# Altium PCB lcarus Som.PcbDoc
Units mm, origin at the board's own origin, x right, y up, seen from the top; angles counter-clockwise.
Board outline 24 x 30 mm, 2 copper layers (Top Layer, Bottom Layer); 20 components, 44 nets, 86 pads, 67 vias.
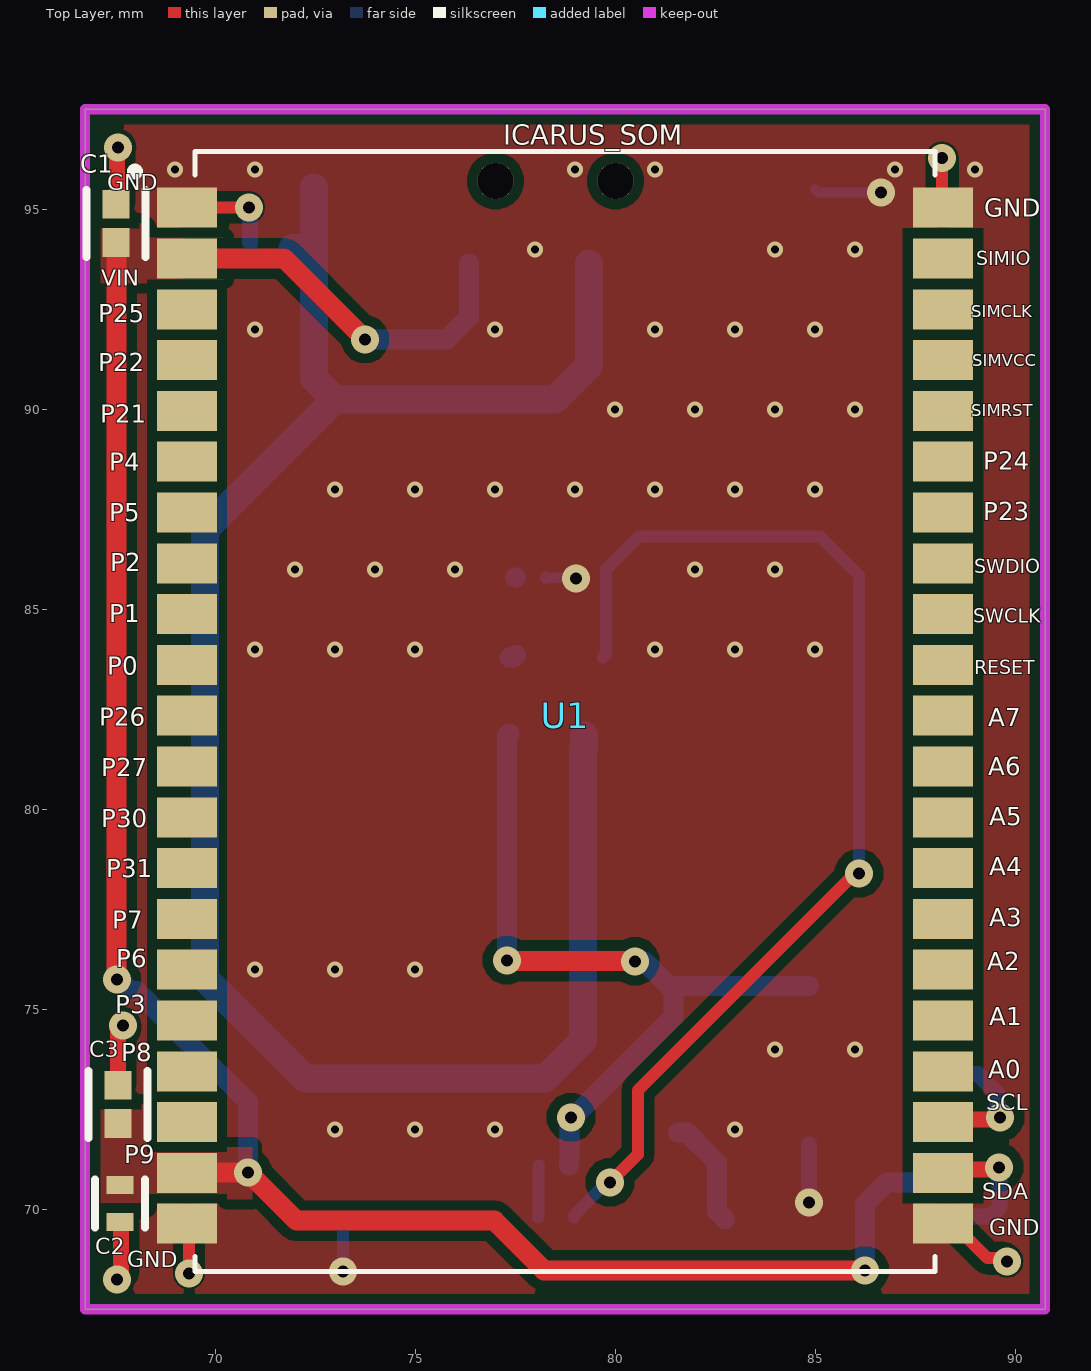
[diagram p0: Top Layer view]
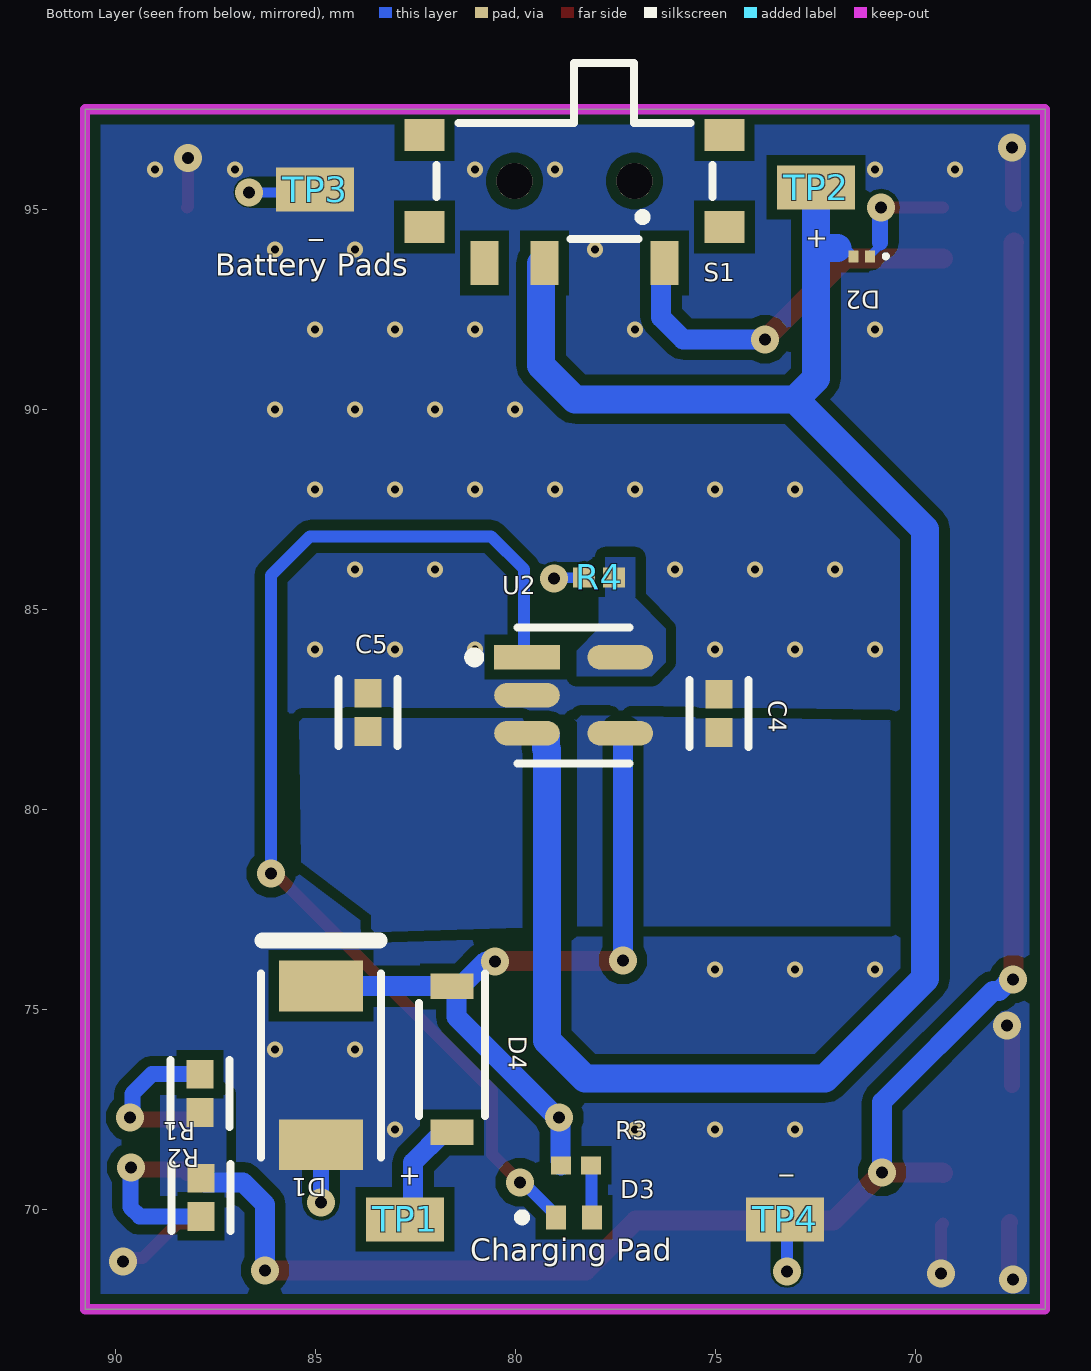
[diagram p1: Bottom Layer view, seen from below]
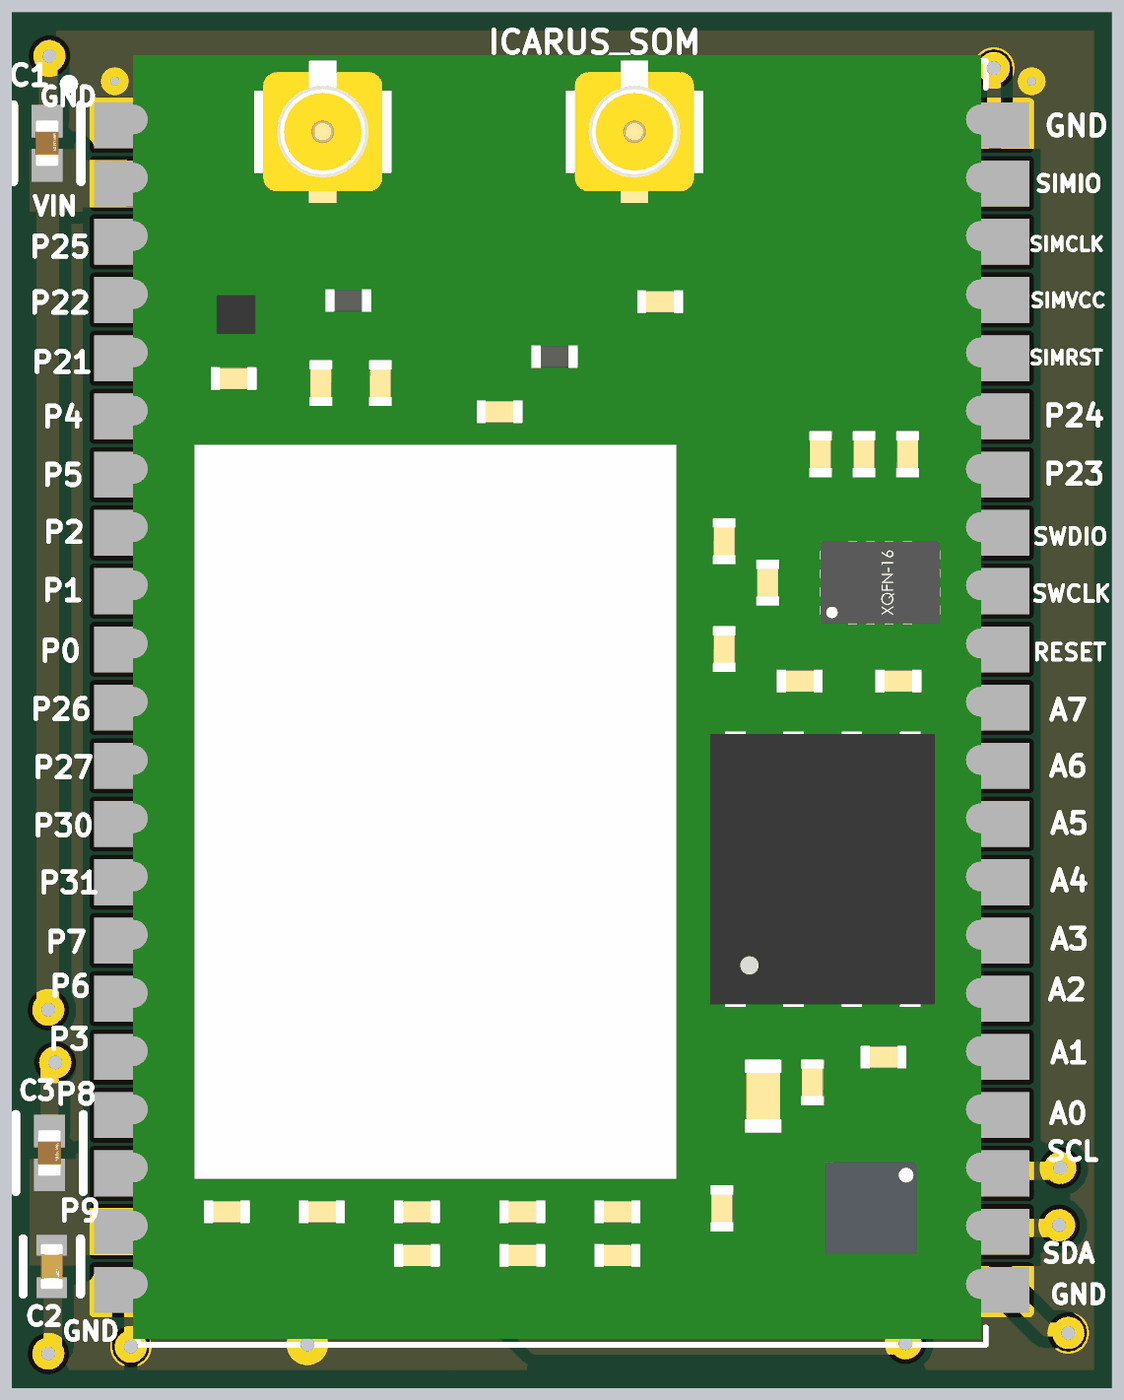
[diagram p2: 3D render of the assembled board from above, using the file's embedded part models]
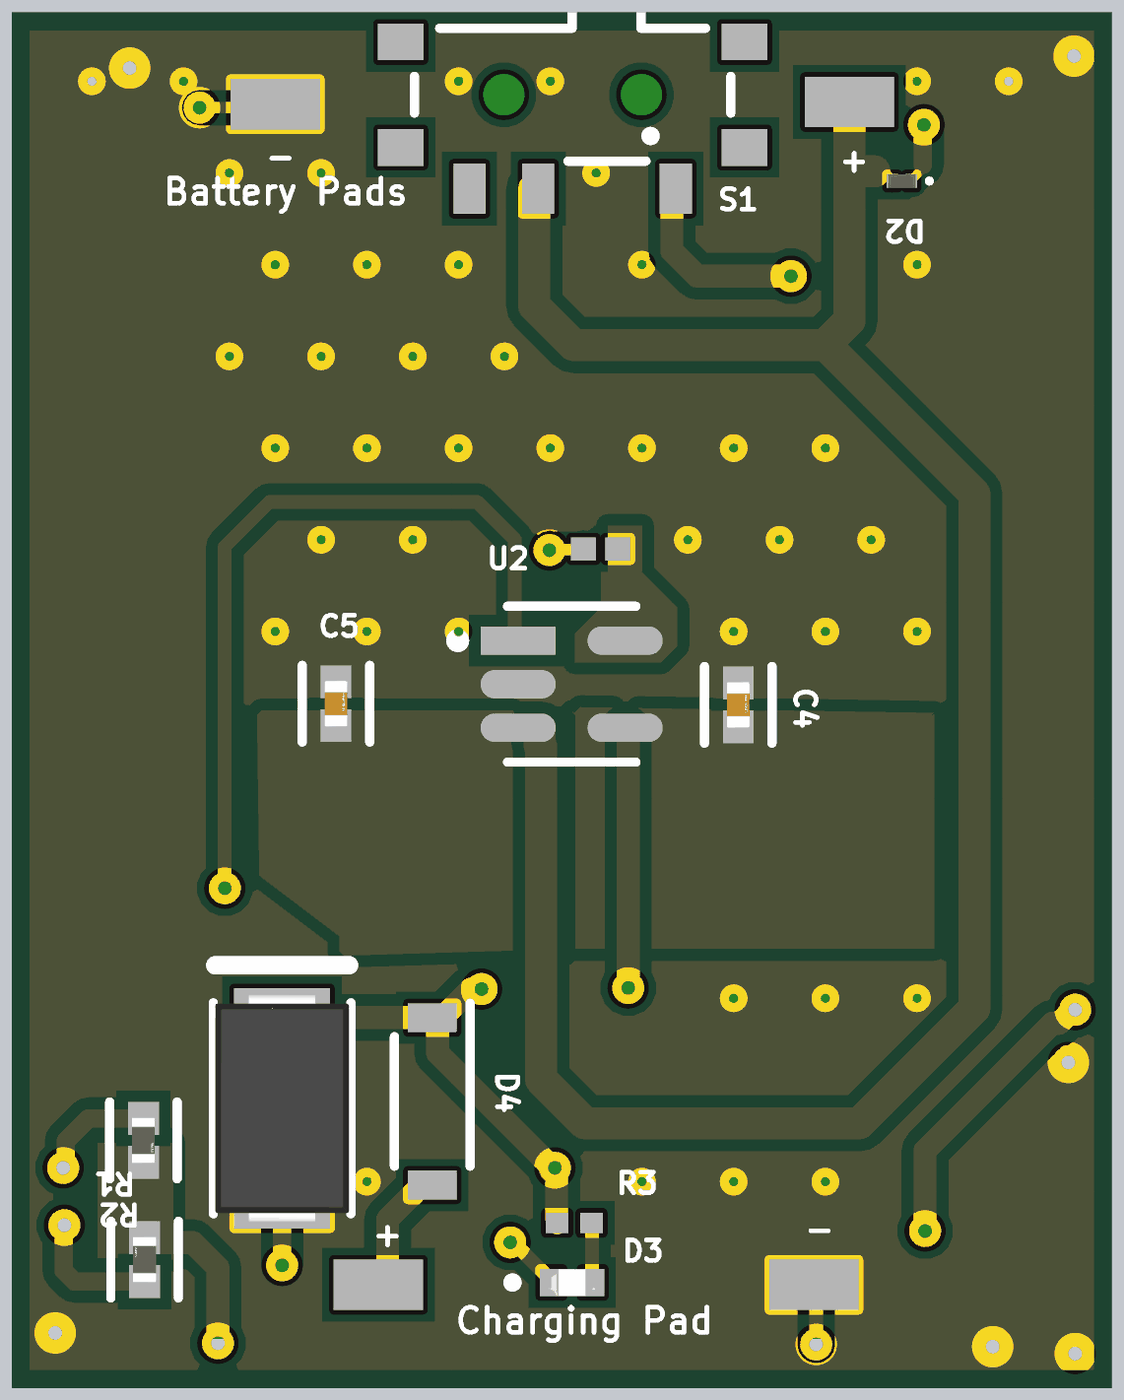
[diagram p3: 3D render of the assembled board from below, using the file's embedded part models]

## Layer stack, top to bottom
Top Solder: solder mask 0.0102, Solder Resist, Dk 3.5
Top Layer: signal copper 0.0356
Dielectric 1: dielectric 0.32, FR-4, Dk 4.8
Bottom Layer: signal copper 0.0356
Bottom Solder: solder mask 0.0102, Solder Resist, Dk 3.5

## Board outline
66.75,67.5 66.75,97.5 90.75,97.5 90.75,67.5

## Design rules (kind name [scope] priority, off if disabled: settings)
Clearance "Stitching GND" [IsStitchingVia and InNet('GND') vs (IsVia and (Not IsStitchingVia)) Or IsPad] p1: gap=0.05 ignorepadtopadclearanceinfootprint=FALSE
Clearance [All] p2: gap=0.254 ignorepadtopadclearanceinfootprint=TRUE except(0.2: Arc-SMDPad Track-SMDPad SMDPad-SMDPad)
MinimumSolderMaskSliver [All] p1: minsoldermaskwidth=0.1
PlaneConnect [All] p1: planeconnectstyle=Direct reliefexpansion=0.508 reliefentries=4 reliefconductorwidth=0.254 reliefairgap=0.254
PolygonConnect [All] p1: connectstyle=Direct reliefconductorwidth=0.254 reliefentries=4 polygonreliefangle="90 Angle" airgapwidth=0.254
RoutingVias [All] p1: holewidth=0.3 width=0.5 viastyle="Through Hole" minholewidth=0.2 minwidth=0.4 maxholewidth=0.35 maxwidth=0.7
SilkToSilkClearance [All] p1: silktosilkclearance=0.02
SilkToSolderMaskClearance [IsPad] p1: minsilkscreentomaskgap=0.02 clearancetoexposedcopper=TRUE
SolderMaskExpansion [All] p1: expansion=0.102 istentingtop=FALSE
Width [All] p1: maxlimit=1 minlimit=0.2 preferedwidth=0.5
26 further rules are at their usual default settings.

## Components (designator, comment, footprint, x,y, rotation, side; value= is the part's Value field where it differs from the comment)
C1 "CL05A104KA5NNNC" FP-CL278-IPC_A 67.525,94.65 r90 top
C2 "CL05A106MP5NUNC" FP-CL05A106MP5NUNC-MFG 67.625,70.15 r270 top value=10uF
C3 "CL05A104KA5NNNC" FP-CL278-IPC_A 67.575,72.625 r90 top
C4 "CL05A475MP5NRNC" FP-CL282-IPC_A 74.9,82.4 r90 bottom
C5 "CL05A475MP5NRNC" FP-CL282-IPC_A 83.675,82.425 r90 bottom
D1 "SMAJ5.0A" BOUR-SMA-2_V 84.85,73.6 r90 bottom
D2 "ESDARF02-1BU2CK" ESDARF021BU2CK 71.331,93.825 r0 bottom
D3 "SML-P11VTT86R" LED_SML-P11VTT86R 78.525,69.8 r180 bottom
D4 "SM5819PL-TP" SODFL3716X120N 81.575,73.75 r270 bottom
R1 "RC0402JR-0710KL" FP-RC0402-0_4-IPC_A 87.85,70.3 r90 bottom
R2 "RC0402JR-0710KL" FP-RC0402-0_4-IPC_A 87.875,72.9 r270 bottom
R3 "RC0402JR-13470RL" RESC1005X40X25LL05T10 78.475,71.1 r0 bottom
R4 "RT0402BRD072KL" RESC1005X35X25LL10T10 77.9,85.8 r180 bottom
S1 "450404015514" 450404015514 78.513,95.707 r180 bottom
TP1 "" TP+195X110 82.75,69.75 r180 bottom
TP2 "" TP+195X110 72.475,95.55 r180 bottom
TP3 "" TP+195X110 85,95.5 r0 bottom
TP4 "" TP+195X110 73.25,69.75 r0 bottom
U1 "ICARUS_SOM" MODULE_ICARUS_SOM 78.75,82.44 r0 top
U2 "MCP73831T-2ACI/OT" FP-C04-091-OT-IPC_A 78.534,82.85 r180 bottom

## Footprints (in the part's own frame and the unit in brackets; to place one, negate y for a bottom-side part, rotate by r counter-clockwise, add the part's x,y. Pads: shape width x height; smd on the part's side, far side on the other; paste and mask are expansions set on the pad)
450404015514 [mm]
  rect 0.7x1.1 smd: 1(2.25,-2.05) 2(-0.75,-2.05) 3(-2.25,-2.05)
  rect 1x0.8 smd: Z1(-3.75,1.15) Z2(3.75,1.15) Z3(3.75,-1.15) Z4(-3.75,-1.15)
  round 0.9 hole 0.9 unplated: ""(-1.5,0) ""(1.5,0)
  silkscreen extent -3.45,-1.45 3.45,2.95
BOUR-SMA-2_V [mm] "SMA, 2-Leads, Body 4.57x2.92mm"
  rect 1.27x2.1 smd: 1(-1.985,0) 2(1.985,0)
  silkscreen extent -2.3,-1.5 3.12,1.5, body extent -2.5,-1.46 2.5,1.46, height 2.62
ESDARF021BU2CK [mm]
  rect 0.244x0.3 smd: 1(-0.206,0) 2(0.206,0)
  silkscreen extent -0.65,-0.05 -0.55,0.05, body extent -0.3,-0.15 0.3,0.15, height 0.43
FP-C04-091-OT-IPC_A [mil]
  rect 64.5x24.33 smd paste+0 mask+0: 1(-45.91,37.4)
  rrect100% 64.5x24.33 smd paste+0 mask+0: 2(-45.91,0) 3(-45.91,-37.4) 4(45.91,-37.4) 5(45.91,37.4)
  silkscreen extent -103,-67 55,67
FP-CL05A106MP5NUNC-MFG [mm]
  rect 0.45x0.675 smd paste+0 mask+0: 1(-0.463,0) 2(0.463,0)
  silkscreen extent -0.6,-0.63 0.6,0.63, body extent -0.79,-0.45 0.79,0.45, height 0.25
FP-CL278-IPC_A [mm]
  rect 0.715x0.672 smd paste+0 mask+0: 1(-0.479,0) 2(0.479,0)
  silkscreen extent -0.84,-0.74 0.84,0.74, body extent -1.04,-0.54 1.04,0.54, height 0.25
FP-CL282-IPC_A [mm]
  rect 0.715x0.672 smd paste+0 mask+0: 1(-0.479,0) 2(0.479,0)
  silkscreen extent -0.84,-0.74 0.84,0.74, body extent -0.5,-0.25 0.5,0.25, height 0.55
FP-RC0402-0_4-IPC_A [mm]
  rect 0.715x0.672 smd paste+0 mask+0: 1(-0.479,0) 2(0.479,0)
  silkscreen extent -0.84,-0.74 0.84,0.74, body extent -0.5,-0.25 0.5,0.25, height 0.4
LED_SML-P11VTT86R [mm]
  rect 0.5x0.6 smd: A(0.45,0) K(-0.45,0)
  silkscreen extent -1.4,-0.1 -1.2,0.1, body extent -0.5,-0.3 0.5,0.3, height 0.21
MODULE_ICARUS_SOM [mm]
  rect 1.5x1 smd: 1(-9.45,12.6) 2(-9.45,11.33) 3(-9.45,10.06) 4(-9.45,8.79) 5(-9.45,7.52) 6(-9.45,6.25) 7(-9.45,4.98) 8(-9.45,3.71) 9(-9.45,2.44) 10(-9.45,1.17) 11(-9.45,-0.1) 12(-9.45,-1.37) 13(-9.45,-2.64) 14(-9.45,-3.91) 15(-9.45,-5.18) 16(-9.45,-6.45) 17(-9.45,-7.72) 18(-9.45,-8.99) 19(-9.45,-10.26) 20(-9.45,-11.53) 21(-9.45,-12.8) 22(9.45,-12.8) 23(9.45,-11.53) 24(9.45,-10.26) 25(9.45,-8.99) 26(9.45,-7.72) 27(9.45,-6.45) 28(9.45,-5.18) 29(9.45,-3.91) 30(9.45,-2.64) 31(9.45,-1.37) 32(9.45,-0.1) 33(9.45,1.17) 34(9.45,2.44) 35(9.45,3.71) 36(9.45,4.98) 37(9.45,6.25) 38(9.45,7.52) 39(9.45,8.79) 40(9.45,10.06) 41(9.45,11.33) 42(9.45,12.6)
  silkscreen extent -10.85,-14 9.25,14, body extent -9.36,-13.87 9.14,14.13, height 2.33
RESC1005X35X25LL10T10 [mm] "Chip Resistor, 2-Leads, Body 1.00x0.50mm, IPC High Density"
  rect 0.55x0.5 smd: 1(-0.375,0) 2(0.375,0)
  body extent -0.55,-0.3 0.55,0.3, height 0.35
RESC1005X40X25LL05T10 [mm] "Chip Resistor, 2-Leads, Body 1.00x0.50mm, IPC High Density"
  rect 0.5x0.45 smd: 1(-0.375,0) 2(0.375,0)
  body extent -0.53,-0.27 0.53,0.28, height 0.4
SODFL3716X120N [mm]
  rect 0.63x1.07 smd: 1(-1.825,0) 2(1.825,0)
  silkscreen extent -2.14,-0.82 1.41,0.82
TP+195X110 [mm]
  rect 1.95x1.1 smd: 1(0,0)

## Part data
C1 C3: library part CMP-13271-000728-1, "Cap Ceramic 100nF 25V X5R ±10% SMD 0402 +85°C Paper T/R", Capacitance=100nF, Case Code (Imperial)=0402, Case Code (Metric)=1005, Dielectric=X5R, Max Operating Temperature=85°C, Min Operating Temperature=-55°C, Package Quantity=1, Tolerance=10%, Voltage=25V, Case/Package=0402, Depth=0.5mm, Height=0.5mm, Lead Free="Lead Free", Length=1mm, Mount="Surface Mount", Packaging="Tape and Reel", Radiation Hardening=No, Thickness=0.022inch, Voltage Rating=25V, Voltage Rating (DC)=25V, Width=0.02inch
C2: library part CMP-13271-000002-1, "CAP CER 10UF 10V X5R 0402", Capacitance=10uF, Manufacturer=Samsung, Temperature="-55°C to +85°C", Temperature Characteristic=X5R, Temperature Coefficient=15%, Temperature Range High=+85°C, Temperature Range Low=-55°C, Tolerance=20%, Voltage Rating=10V, Automotive=No, Category=Cap, ComponentLink2Description=Datasheet, ComponentLink2URL=http://www.samsungsem.com/kr/support/product-search/mlcc/__icsFiles/afieldfile/2019/05/10/19-CL05A106MP5NUNC.pdf, Device Class L1="Passive Components", Device Class L2=Capacitors, Device Class L3="Ceramic Capacitors", Digikey Description="CAP CER 10UF 10V X5R 0402", Height=0.7mm, Ipc Land Pattern Name=CAPC10050X50, Lead Free=Yes, Manufacturer Part Number=CL05A106MP5NUNC, Material=Ceramic, Octopart=https://octopart.com/cl05a106mp5nunc-samsung-22457395, Package=CL05A106MP5NUNC, RoHS=TRUE
C4 C5: library part CMP-13271-000548-1, "Cap Ceramic 4.7uF 10V X5R ±20% SMD 0402 +85°C Paper T/R", Capacitance=4.7uF, Case Code (Imperial)=0402, Case Code (Metric)=1005, Dielectric=X5R, Max Operating Temperature=85°C, Min Operating Temperature=-55°C, Package Quantity=10000, Tolerance=20%, Voltage Rating=10V, Case/Package=0402, Lead Free="Lead Free", Length=0.039inch, Mount="Surface Mount", Packaging="Tape and Reel", Thickness=0.022inch, Width=0.02inch
D1: library part CMP-2000-07090-1, "SMAJ Transient Voltage Suppressor Diode Series, 3.5 V, -55 to 150 degC, 2-Pin SMA, RoHS, Tape and Reel", Capacitance @ Frequency=-, Current - Peak Pulse (10/1000µs)=43.5A, Manufacturer=Bourns, Operating Temperature=-55°C~150°C(TJ), Package / Case=DO-214AC,SMA, Package Description="2-Pin Surface Mount Device, Body 4.315 x 2.605 mm", Package Reference=SMA-2, Power - Peak Pulse=400W, Power Line Protection=No, Standard Package=1, Supplier Device Package=SMA(DO-214AC), Voltage - Breakdown (Min)=6.4V, Voltage - Clamping (Max) @ Ipp=9.2V, Voltage - Reverse Standoff (Typ)=5V, Applications=GeneralPurpose, Bidirectional Channels=-, Catalog Drawings=SMAJSeriesFootprintSMAJ,SMBJSeries, Category=CircuitProtection, Datasheet URL=https://datasheet.ciiva.com/25624/0900766b8112213b-25624680.pdf, Datasheet Version=08/2012, EDA / CAD Models=DownloadfromAcceleratedDesigns, Family=TVS-Diodes, Featured Product=SMAJ/SMBJ/SMCJ/SMLJDiscreteTVSDiodes, Manufacturer URL=http://www.bourns.com/, Mounting Technology=SurfaceMount, Mounting Type=SurfaceMount, Online Catalog=SMAJSeries, Other Names=SMAJ5.0ABDKR, Packaging=Digi-Reel®, RoHS Information=SMAJSeriesMaterialDeclaration, Series=SMAJ, Type=Zener, Unidirectional Channels=1
D2: "STMicroelectronics ESDARF02-1BU2CK Bi-Directional ESD Protection Diode, 20W peak, 2-Pin ST-0201", Manufacturer_Name=STMicroelectronics, Mouser Part Number=511-ESDARF02-1BU2CK, Datasheet Link=https://www.st.com/resource/en/datasheet/esdarf02-1bu2ck.pdf, Geometry.Height=0.33mm, Manufacturer_Part_Number=ESDARF02-1BU2CK, Mouser Price/Stock=https://www.mouser.co.uk/ProductDetail/STMicroelectronics/ESDARF02-1BU2CK?qs=Ng9CY5lTJpiKVTbvT0A0SQ%3D%3D
D3: "Red 626nm LED Indication - Discrete 1.8V 0402 (1006 Metric)", Package="0402 Rohm", Check_prices=https://www.snapeda.com/parts/SML-P11VTT86R/Rohm/view-part/?ref=eda, Digi-Key_Part_Number=846-SML-P11VTT86RTR-ND, MF=Rohm, MP=SML-P11VTT86R, Purchase-URL=https://pricing.snapeda.com/search?q=SML-P11VTT86R&ref=eda, SnapEDA_Link=https://www.snapeda.com/parts/SML-P11VTT86R/Rohm/view-part/?ref=snap
D4: "Schottky Barrier Rectifiers", Manufacturer_Name=MCC, Mouser Part Number=833-SM5819PL-TP, Datasheet Link=https://mccsemi.com/pdf/Products/SM5817PL-SM5819PL(SOD-123FL).pdf, Geometry.Height=1.2mm, Manufacturer_Part_Number=SM5819PL-TP, Mouser Price/Stock=https://www.mouser.co.uk/ProductDetail/Micro-Commercial-Components-MCC/SM5819PL-TP?qs=SdqRYZZ9IxAC1pyGL%2FvLRg%3D%3D
R1 R2: library part CMP-2002-07915-3, "RES 10K OHM 5% 1/16W 0402", Case Code (Imperial)=0402, Case Code (Metric)=1005, Max Operating Temperature=155°C, Max Power Dissipation=63mW, Min Operating Temperature=-55°C, Package Quantity=1, Power Rating=62.5mW, Resistance=10kR, Resistance Tolerance=5%, Resistor Type="Thick Film", Temperature Coefficient=100ppm/°C, Voltage Rating=50V, Case/Package=0402, Construction=Rectangular, Depth=0.5mm, Features="Moisture Resistant", Height=0.016inch, Lead Free="Lead Free", Length=0.039inch, Military Standard=Not, Number of Terminations=2, Packaging="Tape and Reel", RoHS Compliant=Yes, Series=RC, Size Code=0402, Termination=SMD/SMT, Tolerance=5%, Width=0.02inch
R3: library part CMP-2002-08087-1, "RES 470R", Manufacturer=Yageo, Part Number=RC0402JR-13470RL
R4: library part CMP-2002-02941-1, "RES 2K", Manufacturer=Yageo, Part Number=RT0402BRD072KL
S1: "MINI SLIDE SWITCH 6.7 X 2.7 MM.", Package=None, Availability="In Stock", Check_prices=https://www.snapeda.com/parts/450404015514/Wurth+Elektronik/view-part/?ref=eda, MF="WÃ¼rth Elektronik", MP=450404015514, Price=None, Purchase-URL=https://pricing.snapeda.com/search/part/450404015514/?ref=eda, SnapEDA_Link=https://www.snapeda.com/parts/450404015514/Wurth+Elektronik/view-part/?ref=snap
TP1 TP2 TP3 TP4: library part RCU-0C, "Natural PC Test Point - - Plating Surface Mount Mounting Type", Package=None, Availability="In Stock", Check_prices=https://www.snapeda.com/parts/RCU-0C/TE+Connectivity/view-part/?ref=eda, MF="TE Connectivity AMP Connectors", MP=RCU-0C, Price=None, Purchase-URL=https://pricing.snapeda.com/search/part/RCU-0C/?ref=eda, SnapEDA_Link=https://www.snapeda.com/parts/RCU-0C/TE+Connectivity/view-part/?ref=snap
U1: "Module for IoT connectivity. Includes global LTE-M & NB-IoT, GPS, Accelerometer as well as an eSIM for connectivity out of the box.", Package=None, Availability="Not in stock", MF=Actinius, MP="Icarus SOM", Price=None
U2: library part CMP-0133-00143-2, "IC CONTROLLR LI-ION 4.2V SOT23-5", Case/Package=SOT-23, Drain to Source Resistance=350mR, Max Charge Current=500mA, Max Input Voltage=6V, Max Operating Temperature=85°C, Max Output Voltage=4.5V, Max Power Dissipation=1.54W, Min Operating Temperature=-40°C, Min Output Voltage=4.168V, Min Supply Voltage=3.75V, Output Voltage=4.2V, Voltage Rating=4.534V, Contact Plating=Tin, Height=0.051inch, Lead Free="Lead Free", Length=0.122inch, Max Supply Voltage=6V, Mount="Surface Mount", Number of Cells=1, Number of Channels=1, Number of Outputs=1, Number of Pins=5, Output Current=500mA, Packaging="Tape and Reel", Radiation Hardening=No, REACH SVHC="No SVHC", Termination=SMD/SMT, Weight=0.00709oz, Width=0.071inch

## Via types
v1: diameter 0.4, hole 0.2, Top Layer to Bottom Layer, 45 vias
v2: diameter 0.7, hole 0.3, Top Layer to Bottom Layer, 22 vias

## Nets (pads, with @x,y where several pads share a name; then routed paths per layer and width w, separated by ;. In a path a pad name is that pad's centre, name@x,y a point inside that pad or via, vN(x,y) a via of type N, cw(c..) or ccw(c..) an arc to the next point about the centre after c; other vN are vias at no path point)
A0: U1.25
A1: U1.26
A2: U1.27
A3: U1.28
A4: U1.29
A5: U1.30
A6: U1.31
A7: U1.32
GND: C1.2 C2.2 C3.2 C4.2 C5.2 D1.1 D2.1 R4.1 TP3.1 TP4.1 U1.1 U1.21 U1.22 U1.42 U2.2 | length 17.1
  Top Layer w0.3: U1.21 69.35,69.59 v2(69.35,68.4) ; U1.1 69.31,95.05 v2(70.85,95.05) ; v2(88.176,96.288) 88.176,95.064 U1.42 ; U1.22 88.45,69.64 89.313,68.777 89.723,68.777 v2(89.8,68.7)
  Top Layer w0.4: C1.2 67.55,95.154 67.55,96.525 v2(67.575,96.55) ; v2(67.55,68.25) 67.55,68.331 67.65,68.431 67.65,69.662 C2.2 ; C3.2 67.575,74.394 67.7,74.519 v2(67.7,74.6)
  Bottom Layer w0.2: 70.875,94.097 71.125,93.847 D2.1
  Bottom Layer w0.25: 70.875,94.097 70.875,94.175 ; TP3.1 85.075,95.425 v2(86.65,95.425)
  Bottom Layer w0.254: R4.1@78.287,85.788 v2@79.007,85.788
  Bottom Layer w0.3: v2(73.2,68.45) 73.2,69.7 TP4.1 ; R4.1 R4.1@78.287,85.788 ; v2@79.007,85.788 v2(79.019,85.776)
  Bottom Layer w0.4: v2(70.85,95.05) 70.875,95.025 70.875,94.175 ; v2(84.85,70.175) D1.1
  other v1: 73,72 75,72 77,72 83,72 84,74 86,74 71,76 73,76 75,76 71,84 73,84 75,84 81,84 83,84 85,84 72,86 74,86 76,86 82,86 84,86 73,88 75,88 77,88 79,88 81,88 83,88 85,88 80,90 82,90 84,90 86,90 71,92 77,92 81,92 83,92 85,92 78,94 84,94 86,94 69,96 71,96 79,96 81,96 87,96 89,96
NANO_SIM_CLK: U1.40
NANO_SIM_IO: U1.41
NANO_SIM_RST: U1.38
NANO_SIM_VCC: U1.39
NetC4_1: C4.1 D1.2 D4.1 R3.2 U2.4 | length 19.2
  Top Layer w0.5: v2(77.3,76.225) 77.312,76.213 80.487,76.213 v2(80.5,76.2)
  Bottom Layer w0.5: v2(77.3,76.225) 77.3,81.846 77.354,81.9 U2.4 ; R3.2 78.85,71.196 78.862,71.208 78.862,72.262 v2(78.9,72.3) 78.954,72.3 81.457,74.803 81.457,75.51 81.522,75.575 D4.1 ; v2(80.5,76.2) 80.73,76.2 81.355,75.575 D4.1 ; D1.2 84.845,75.58 81.58,75.58 D4.1
NetC5_1: C5.1 D2.2 S1.2 TP2.1 U2.3 | length 50.1
  Bottom Layer w0.2: D2.2@71.537,93.847 71.725,94.035
  Bottom Layer w0.25: 71.725,94.035 71.933,94.035
  Bottom Layer w0.7: 71.933,94.035 72.475,94.035 ; TP2.1 72.475,94.035 ; U2.3@79.231,81.859 79.231,81.521 79.2,81.49 79.2,74.225 78.25,73.275 72.25,73.275 69.75,75.775 69.75,87 73,90.25 ; S1.2@79.35,93.65 79.35,91.1 78.5,90.25 73,90.25 ; 72.475,94.035 72.475,90.775 73,90.25
NetD3_A: D3.A R3.1 | length 1.3
  Bottom Layer w0.3: D3.A 78.087,69.812 78.087,71.088 R3.1
NetD3_K: D3.K U2.1 | length 28.4
  Top Layer w0.3: v2(79.875,70.675) 80.575,71.375 80.575,72.975 86,78.4 v2(86.1,78.4)
  Bottom Layer w0.3: D3.K 78.975,69.85 79.8,70.675 v2(79.875,70.675) ; U2.1 79.773,83.873 79.773,85.998 80.6,86.825 85.125,86.825 86.1,85.85 v2(86.1,78.4)
NetD4_2: D4.2 TP1.1 | length 2.8
  Bottom Layer w0.5: D4.2 81.795,71.925 82.55,71.17 82.55,69.95 TP1.1
NetR1_1: R1.1 U1.23 | length 4.3
  Top Layer w0.4: U1.23 88.283,70.993 89.543,70.993 v2(89.6,71.05)
  Bottom Layer w0.4: R1.1 89.382,69.821 89.616,70.056 89.616,71.034 v2(89.6,71.05)
NetR2_1: R2.1 U1.24 | length 4
  Top Layer w0.4: U1.24 88.263,72.243 89.568,72.243 v2(89.625,72.3)
  Bottom Layer w0.4: R2.1 89.077,73.379 89.568,72.888 89.568,72.357 v2(89.625,72.3)
NetR4_2: R4.2 U2.5 | length 0.2
  Bottom Layer w0.5: U2.5 77.471,83.8 U2.5@77.525,83.854 ; R4.2@77.5,85.8 R4.2
P0: U1.10
P1: U1.9
P2: U1.8
P3: U1.17
P4: U1.6
P5: U1.7
P6: U1.16
P7: U1.15
P8: U1.18
P9: U1.19
P21: U1.5
P22: U1.4
P23: U1.36
P24: U1.37
P25: U1.3
P26: U1.11
P27: U1.12
P30: U1.13
P31: U1.14
RESET: U1.33
SWCLK: U1.34
SWDIO: U1.35
VIN: C1.1 C2.1 C3.1 R1.2 R2.2 S1.1 U1.2 U1.20 | length 55.7
  Top Layer w0.5: C1.1 67.538,94.159 67.538,75.763 v2(67.55,75.75) ; U1.20 69.308,70.918 70.818,70.918 v2(70.825,70.925) 72.032,69.718 76.982,69.718 78.225,68.475 v2(86.25,68.475) ; U1.2 71.73,93.77 v2(73.75,91.75)
  Bottom Layer w0.5: v2(67.55,75.75) 67.604,75.75 67.9,75.454 68.054,75.454 70.825,72.683 v2(70.825,70.925) ; v2(73.75,91.75) 75.8,91.75 76.35,92.3 S1.1@76.35,93.65 ; v2(86.25,68.475) 86.25,70.125 86.796,70.671 87.764,70.671 87.85,70.757 R1.2
pads on no net: S1. S1.3 S1.Z1 S1.Z2 S1.Z3 S1.Z4

## Polygon pours and split planes (outlines as drawn)
GND on Bottom Layer "NONET_L-01_P-001" (solid, pour order 43): 66.975,97.275 67,97.25 90.525,97.25 90.525,67.775 90.55,67.75 66.975,67.75 66.975,97.25
VIN on Bottom Layer "NONET_L-01_P-001" (solid, pour order 42): 87.225,72.875 87.25,72.85 88.875,72.85 88.875,70.3 87.225,70.3 87.225,72.85
NetR4_2 on Bottom Layer "NONET_L-01_P-001" (solid, pour order 25): 76.996,86.304 77.901,86.304 77.901,84.527 78.462,83.965 78.462,83.325 76.582,83.325 76.225,83.682 76.225,84.51 77.011,85.296 76.996,85.311
GND on Bottom Layer "NONET_L-01_P-001" (solid, pour order 35): 85.65,82.4 85.65,85.575 84.85,86.375 80.775,86.375 80.775,83.375 80.725,83.325 76.2,83.325 76.2,86.675 71.825,86.675 70.5,85.35 70.5,82.425 70.525,82.4 81.75,82.4
NetC5_1 on Bottom Layer "NONET_L-01_P-001" (solid, pour order 23): 85.4,82.275 78.853,82.275 78.853,77.068 83.6,76.925 83.6,77.35 85.35,78.675
NetC4_1 on Bottom Layer "NONET_L-01_P-001" (solid, pour order 22): 78.525,82.25 78.45,82.175 78.45,77.075 70.625,77.075 70.625,82.2 70.675,82.175 70.625,82.225 78.35,82.35 78.475,82.225
GND on Top Layer "NONET_L-01_P-001" (solid, pour order 44): 67.1,97.15 67.125,97.125 90.65,97.125 90.65,67.65 90.675,67.625 67.1,67.625 67.1,97.125
VIN on Top Layer "NONET_L-01_P-001" (solid, pour order 41): 66.95,72.625 68.325,72.625 68.325,71.55 70.925,71.55 70.925,70.25 68.35,70.25 68.35,70 68.225,70.125 66.925,70.125 66.925,72.6
VIN on Top Layer "NONET_L-01_P-001" (solid, pour order 40): 70.225,94.4 70.225,93.15 66.925,93.15 66.9,93.175 66.9,94.65 68.175,94.65 68.425,94.4

## Keep-outs
Keep-Out Layer:
  the board outline again, w0.254

## Silkscreen, mask and mechanical layers (free items; w line width, h text height)
Top Overlay:
  text "GND" at 67.308,95.477 h0.4
  text "GND" at 89.229,94.817 h0.45
  text "SIMIO" at 89.025,93.6 h0.35
  text "VIN" at 67.156,93.089 h0.4
  text "SIMCLK" at 88.905,92.305 h0.3
  text "P25" at 67.08,92.175 h0.45
  text "SIMVCC" at 88.93,91.08 h0.3
  text "P22" at 67.08,90.956 h0.45
  text "SIMRST" at 88.905,89.83 h0.3
  text "P21" at 67.131,89.66 h0.45
  text "P24" at 89.203,88.492 h0.45
  text "P4" at 67.359,88.467 h0.45
  text "P23" at 89.203,87.222 h0.45
  text "P5" at 67.359,87.197 h0.45
  text "P2" at 67.385,85.952 h0.45
  text "SWDIO" at 88.98,85.907 h0.35
  text "P1" at 67.359,84.682 h0.45
  text "SWCLK" at 88.955,84.662 h0.35
  text "RESET" at 88.98,83.38 h0.35
  text "P0" at 67.308,83.361 h0.45
  text "P26" at 67.105,82.091 h0.45
  text "A7" at 89.325,82.078 h0.45
  text "A6" at 89.325,80.853 h0.45
  text "P27" at 67.156,80.821 h0.45
  text "A5" at 89.35,79.604 h0.45
  text "P30" at 67.156,79.551 h0.45
  text "A4" at 89.35,78.354 h0.45
  text "P31" at 67.283,78.307 h0.45
  text "A3" at 89.35,77.079 h0.45
  text "P7" at 67.435,77.011 h0.45
  text "P6" at 67.525,76.05 h0.45
  text "A2" at 89.3,75.975 h0.45
  text "P3" at 67.5,74.9 h0.45
  text "A1" at 89.35,74.6 h0.45
  text "P8" at 67.65,73.7 h0.45
  text "A0" at 89.325,73.275 h0.45
  text "SCL" at 89.275,72.475 h0.4
  text "P9" at 67.725,71.15 h0.45
  text "SDA" at 89.175,70.25 h0.4
  text "GND" at 89.35,69.35 h0.4
  text "GND" at 67.8,68.55 h0.4
Bottom Overlay:
  text "_" at 85.142,94.367 h0.5
  text "+" at 72.747,94.047 h0.5
  text "Battery Pads" at 87.5,93.333 h0.55
  text "_" at 73.382,70.973 h0.5
  text "+" at 82.925,70.617 h0.5
  text "Charging Pad" at 81.125,68.708 h0.55